# EAGLE board DummyLoad (EAGLE 8.6.3)
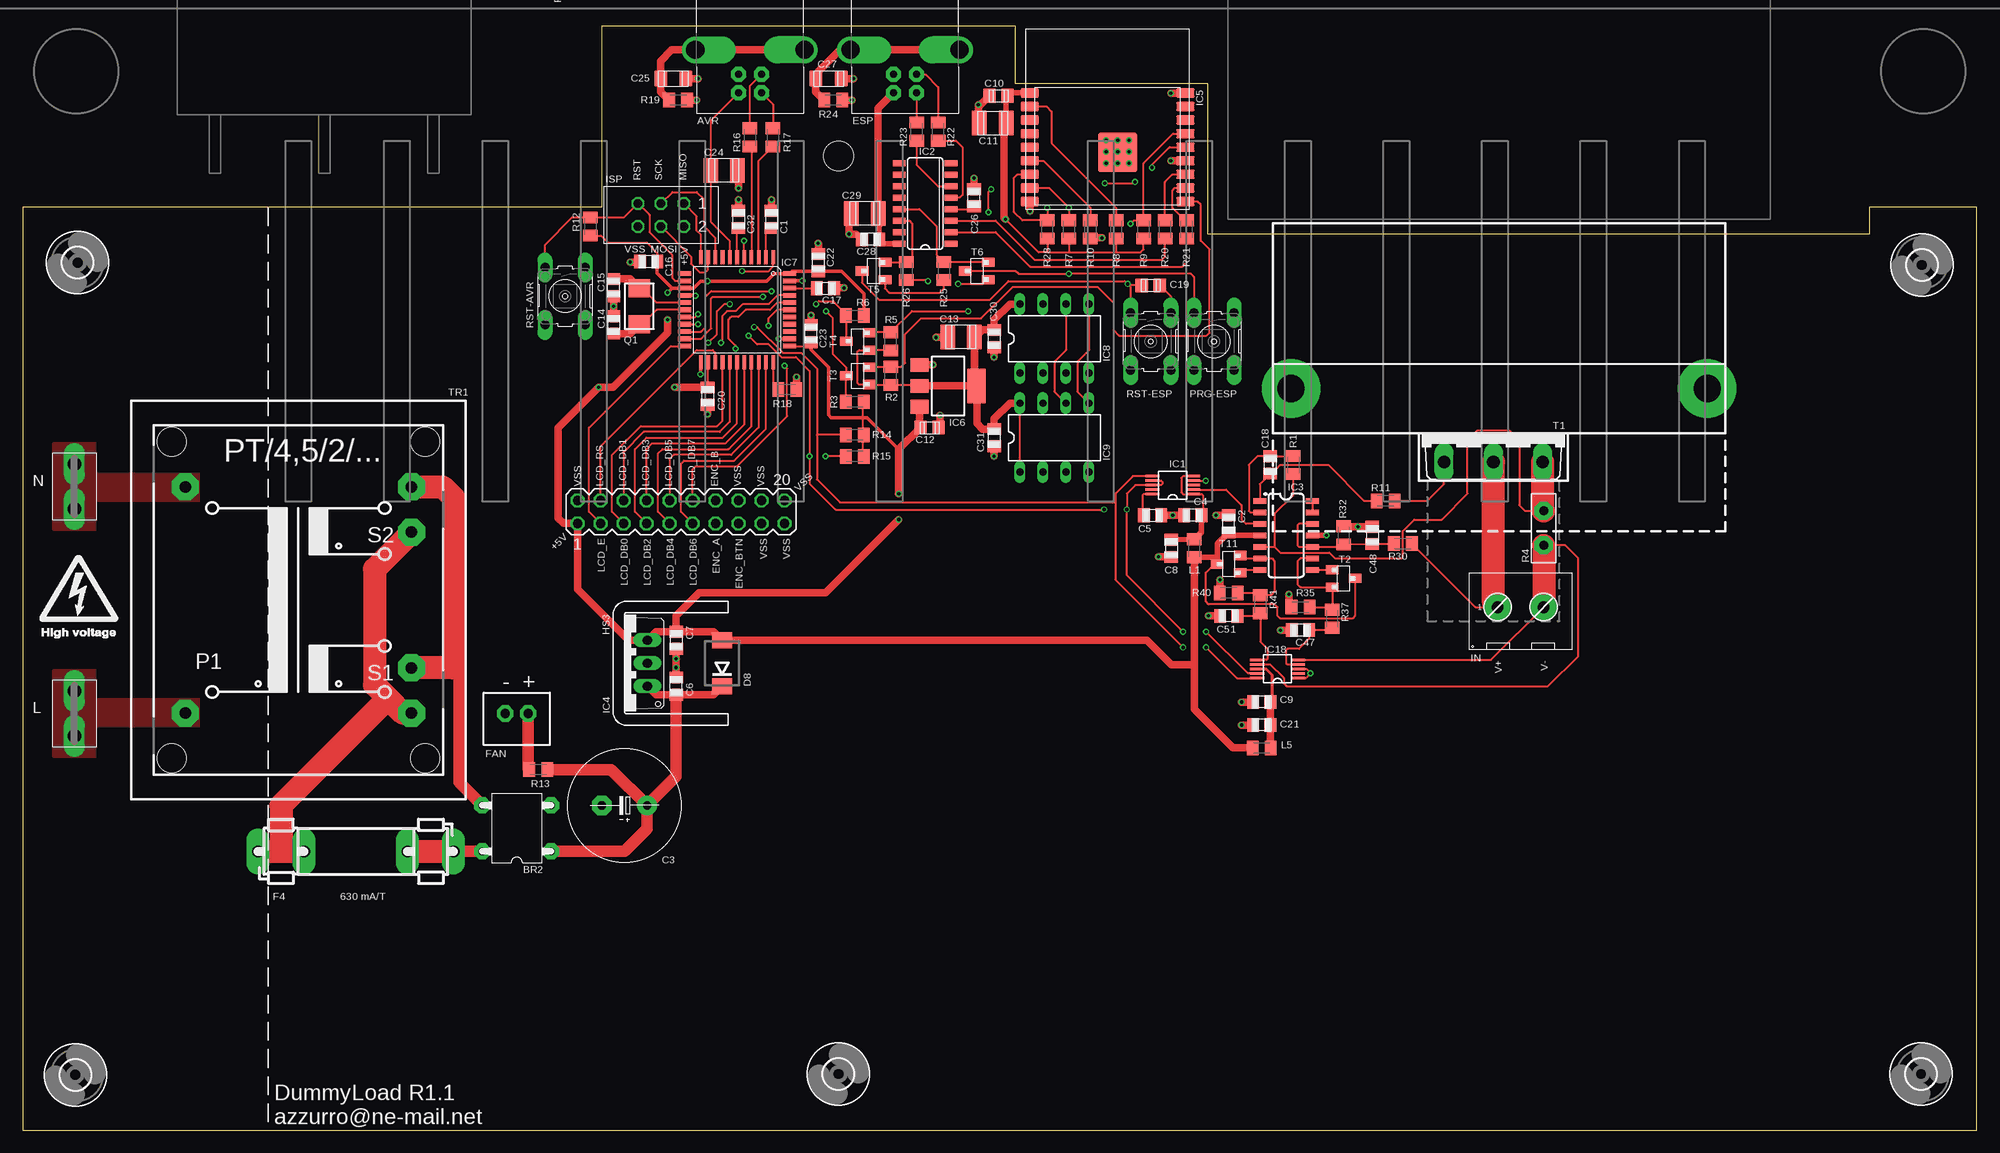
[diagram p0: board, top side]
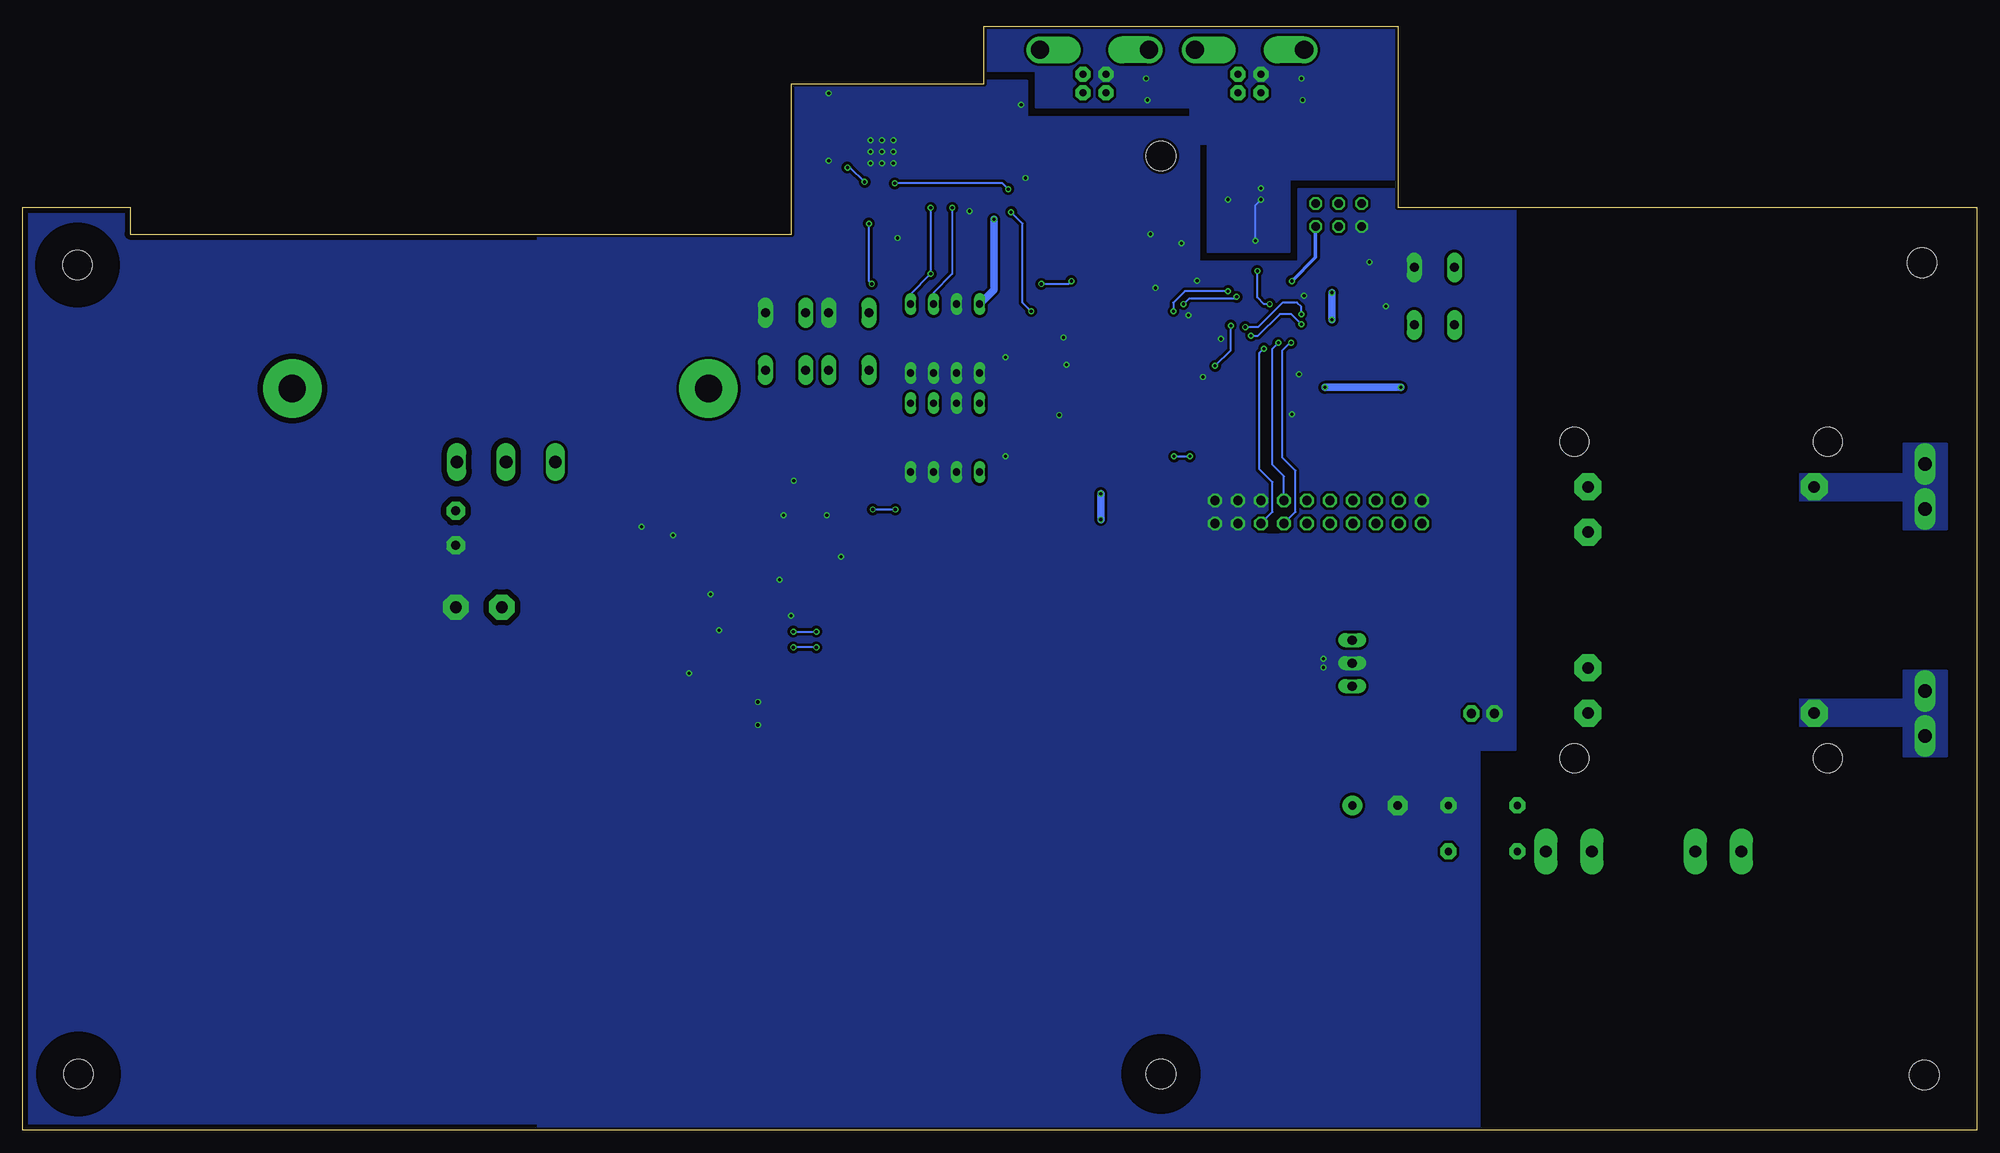
[diagram p1: board, bottom side, seen from below]

Size 216 x 122 mm. Coordinates in mm from the lower left corner, seen from the top.
Outline: 0,0 216,0 216,102 204.12,102 204.12,99 131,99 131,115.65 109.75,115.65 109.75,122 64,122 64,102 0,102 0,0
Copper layers (1*16): Top 0.035mm / dielectric 1.6mm / Bottom 0.035mm
Design rules "devnetX_JLCPCB_2-layer_PCB_eagle_rule": minimum track width 3.5mil, minimum drill 0.2mm, track to track 5mil, track to pad 5mil, pad to pad 5mil, via to via 5mil, smd to smd 0mil, copper to edge 8mil, drill to drill 10mil, minimum pad ring 3mil, minimum via ring 6mil, stop-mask expansion 0mil, vias tented up to drill 100mil, thermal gap 10mil
Holes 3.3 mm at 90.17,107.63
bRestrict: 4 lines

## Footprints (pad centres in the part's own frame; a part is rotated, then mirrored left to right if it is on the bottom)
USB-B = drill 0.8 pad 1.676 octagon: +5V 1.27,4.763; D+ -1.27,2.71; D- -1.27,4.763; GND 1.27,2.71 | drill 2 pad 2.54 offset: SH1 -6.032,0; SH2 6.032,0
BR-DIL2 = drill 0.8 pad 1.778 octagon: AC1 -2.54,3.81; AC2 2.54,3.81; DC+ -2.54,-3.81; DC- 2.54,-3.81
0805 = smd 1.3 x 1.5: 1 -0.953,0; 2 0.953,0
C+/5/12.5 = drill 0.9 pad 2.184: + -2.5,0 | drill 0.9 pad 2.184 octagon: - 2.5,0
C0805 = smd 1.5 x 1.35: 1 0,1; 2 0,-1
C1210 = smd 2.7 x 1.6: 1 0,1.475; 2 0,-1.475
C1206 = smd 1.8 x 1.45: 1 0,1.4; 2 0,-1.4
DO214AA-CGRB307-G = smd 1.8 x 2.2: A 2.55,0; C -2.55,0
F5X20 = drill 1.3 pad 2.54 long: 1 -11.43,0; 2 -6.35,0; 3 5.08,0; 4 10.16,0
JST-PH-2.0-2P = drill 1.016 pad 1.778 octagon: 1 -1.27,0; 2 1.27,0
3,3 = hole 3.3: 0,0
CR201-50 = drill 3 pad 6.452: 1 -23,-4.95; 2 23,-4.95
VSSOP10 = smd 0.3 x 1.55: 1 -1,-2.25; 2 -0.5,-2.25; 3 0,-2.25; 4 0.5,-2.25; 5 1,-2.25; 6 1,2.25; 7 0.5,2.25; 8 0,2.25; 9 -0.5,2.25; 10 -1,2.25
SOP16 = smd 0.635 x 1.422: 1 -4.445,-2.857; 2 -3.175,-2.857; 3 -1.905,-2.857; 4 -0.635,-2.857; 5 0.635,-2.857; 6 1.905,-2.857; 7 3.175,-2.857; 8 4.445,-2.857; 9 4.445,2.857; 10 3.175,2.857; 11 1.905,2.857; 12 0.635,2.857; 13 -0.635,2.857; 14 -1.905,2.857; 15 -3.175,2.857; 16 -4.445,2.857
SO14 = smd 0.6 x 1.4: 1 -3.81,-2.9; 2 -2.54,-2.9; 3 -1.27,-2.9; 4 0,-2.9; 5 1.27,-2.9; 6 2.54,-2.9; 7 3.81,-2.9; 8 3.81,2.9; 9 2.54,2.9; 10 1.27,2.9; 11 0,2.9; 12 -1.27,2.9; 13 -2.54,2.9; 14 -3.81,2.9
TO220V = drill 1.016 long: 1 -2.54,-2.54; 2 0,-2.54; 3 2.54,-2.54
ESP-WROOM02 = smd 2 x 1: 1 -8.6,1.9; 2 -8.6,0.4; 3 -8.6,-1.1; 4 -8.6,-2.6; 5 -8.6,-4.1; 6 -8.6,-5.6; 7 -8.6,-7.1; 8 -8.6,-8.6; 9 -8.6,-10.1; 10 8.6,-10.1; 11 8.6,-8.6; 12 8.6,-7.1; 13 8.6,-5.6; 14 8.6,-4.1; 15 8.6,-2.6; 16 8.6,-1.1; 17 8.6,0.4; 18 8.6,1.9 | smd 4.3 x 4.3: TP 1.12,-4.68
SOT223 = smd 1.5 x 2: 1 -2.3,-3.15; 2 0,-3.15; 3 2.3,-3.15 | smd 3.8 x 2: 4 0,3.15
TQFP44 = smd 1.5 x 0.5: 1 -5.8,4; 2 -5.8,3.2; 3 -5.8,2.4; 4 -5.8,1.6; 5 -5.8,0.8; 6 -5.8,0; 7 -5.8,-0.8; 8 -5.8,-1.6; 9 -5.8,-2.4; 10 -5.8,-3.2; 11 -5.8,-4; 23 5.8,-4; 24 5.8,-3.2; 25 5.8,-2.4; 26 5.8,-1.6; 27 5.8,-0.8; 28 5.8,0; 29 5.8,0.8; 30 5.8,1.6; 31 5.8,2.4; 32 5.8,3.2; 33 5.8,4 | smd 0.5 x 1.5: 12 -4,-5.8; 13 -3.2,-5.8; 14 -2.4,-5.8; 15 -1.6,-5.8; 16 -0.8,-5.8; 17 0,-5.8; 18 0.8,-5.8; 19 1.6,-5.8; 20 2.4,-5.8; 21 3.2,-5.8; 22 4,-5.8; 34 4,5.8; 35 3.2,5.8; 36 2.4,5.8; 37 1.6,5.8; 38 0.8,5.8; 39 0,5.8; 40 -0.8,5.8; 41 -1.6,5.8; 42 -2.4,5.8; 43 -3.2,5.8; 44 -4,5.8
DIL8 = drill 0.813 long: 1 -3.81,-3.81; 2 -1.27,-3.81; 3 1.27,-3.81; 4 3.81,-3.81; 5 3.81,3.81; 6 1.27,3.81; 7 -1.27,3.81; 8 -3.81,3.81
KL2-691311500002 = drill 1.3 pad 2.8 octagon: 1 -2.54,0; 2 2.54,0
ML6 = drill 0.914 octagon: 1 -2.54,-1.27; 2 -2.54,1.27; 3 0,-1.27; 4 0,1.27; 5 2.54,-1.27; 6 2.54,1.27
FASTON-4.8X0.8 = drill 1.5 pad 2.3 long: A1 -2.5,0; A2 2.5,0
C0805K@1 = smd 1.3 x 1.6: 1 -1,0; 2 1,0
MA10-2 = drill 1.016 octagon: 1 -11.43,-1.27; 2 -11.43,1.27; 3 -8.89,-1.27; 4 -8.89,1.27; 5 -6.35,-1.27; 6 -6.35,1.27; 7 -3.81,-1.27; 8 -3.81,1.27; 9 -1.27,-1.27; 10 -1.27,1.27; 11 1.27,-1.27; 12 1.27,1.27; 13 3.81,-1.27; 14 3.81,1.27; 15 6.35,-1.27; 16 6.35,1.27; 17 8.89,-1.27; 18 8.89,1.27; 19 11.43,-1.27; 20 11.43,1.27
B3F-10XX = drill 1 pad 1.676 long: 1 -3.175,1.905; 2 3.175,1.905; 3 -3.175,-2.54; 4 3.175,-2.54
Q-5X3.2MM-TXC-7A.SERIES = smd 2 x 2.4: 1 -2,0; 2 2,0
C0805K = smd 1.3 x 1.6: 1 -1,0; 2 1,0
R-SHUNT-VSR = drill 1 pad 2 octagon: 1 -1.905,0; 2 1.905,0
TOP3AV = drill 1.397 long: B -5.461,-3.175; C 0,-3.175; E 5.461,-3.175
SOT23-BEC = smd 1 x 1.4: B -0.953,-1.27; C 0,1.27; E 0.953,-1.27
SOT23 = smd 1 x 1.4: 1 -0.953,-1.27; 2 0.953,-1.27; 3 0,1.27
PT/4,5/2/.. = drill 1.27 pad 3 octagon: 1 -12.5,12.5; 2 -12.5,-12.5; 3 12.5,-12.5; 4 12.5,-7.5; 5 12.5,7.5; 6 12.5,12.5 | hole 3.2: -14,17.5; -14,-17.5; 14,-17.5; 14,17.5

## Placement (x,y rotation side)
AVR  [USB-B]  80.39,119.38 180 top
BR2  DF04M  [BR-DIL2]  54.61,33.34 90 top
C1  100n/16V  [0805]  82.77,100.65 270 top
C2  100n/16V  [0805]  133.31,66.99 90 top
C3  2200µ/25V  [C+/5/12.5]  66.52,35.88 180 top
C4  100n/16V  [0805]  129.34,67.94 180 top
C5  330n/16V  [0805]  124.89,67.94 0 top
C6  330n/50V  [0805]  72.23,49.05 90 top
C7  100n/50V  [0805]  72.23,54.13 270 top
C8  100n/16V  [0805]  126.96,64.29 270 top
C9  100n/16V  [0805]  136.96,47.31 180 top
C10  100n/16V  [C0805]  107.85,114.3 90 top
C11  10µ/16V  [C1210]  107.22,111.28 90 top
C12  100n/16V  [C0805]  100.23,77.63 90 top
C13  10µ/16V  [C1210]  103.73,87.63 270 top
C14  22pF/50V C0G  [0805]  65.31,88.98 270 top
C15  22pF/50V C0G  [0805]  65.31,93.11 90 top
C16  100n/16V  [0805]  69.2,95.96 180 top
C17  100n/16V  [0805]  88.72,93.03 0 top
C18  1n/50V  [0805]  137.91,73.5 90 top
C19  100n/16V  [C0805]  124.68,93.34 90 top
C20  100n/16V  [0805]  75.71,81.12 270 top
C21  100n/16V  [0805]  136.96,44.77 180 top
C22  100n/16V  [0805]  87.95,95.87 90 top
C23  100n/16V  [0805]  87.14,88.03 90 top
C24  10µ/16V  [C1210]  77.53,106.05 270 top
C25  4n/1kV  [C1206]  71.91,116.2 90 top
C26  100n/16V  [0805]  105.16,103.03 90 top
C27  4n/1kV  [C1206]  89.06,116.2 90 top
C28  100n/16V  [0805]  93.72,98.42 180 top
C29  10µ/16V  [C1210]  93.09,101.28 270 top
C30  100n/16V  [0805]  107.38,87.47 270 top
C31  100n/16V  [0805]  107.38,76.52 270 top
C32  1µ/35V  [0805]  79.12,100.65 270 top
C47  10n/16V  [0805]  141.24,55.24 180 top
C48  100n/16V  [0805]  149.18,65.72 270 top
C51  10n/16V  [0805]  133.31,56.83 180 top
D8  CGRB307-G  [DO214AA-CGRB307-G]  77.31,51.59 90 top
ESP  [USB-B]  97.53,119.38 180 top
F4  630 mA/T  [F5X20]  37.46,30.8 0 top
FAN  [JST-PH-2.0-2P]  54.61,46.04 0 top
H1  MOUNT-HOLE3.3  [3,3]  6.08,95.85 0 top
H2  MOUNT-HOLE3.3  [3,3]  5.83,6.1 0 top
H3  MOUNT-HOLE3.3  [3,3]  90.17,6.2 0 top
H4  MOUNT-HOLE3.3  [3,3]  209.82,6.2 0 top
H5  MOUNT-HOLE3.3  [3,3]  209.93,95.6 0 top
HS1  [CR201-50]  163.19,76.99 180 top
HS3  D01S  [D01S]  66.52,51.59 270 top
IC1  DAC70501ZDGS  [VSSOP10]  127.11,71.28 90 top
IC2  CH340C  [SOP16]  99.76,102.39 90 top
IC3  QUAD-OPVOPA4197  [SO14]  139.66,65.72 270 top
IC4  7805TV  [TO220V]  66.52,51.59 90 top
IC5  ESP-WROOM02  [ESP-WROOM02]  119.92,112.71 0 top
IC6  LD117AS33TR  [SOT223]  102.3,82.23 270 top
IC7  ATMEGA32U4-AU  [TQFP44]  78.96,90.65 270 top
IC8  24LC512P  [DIL8]  114.05,87.47 0 top
IC9  24LC512P  [DIL8]  114.05,76.52 0 top
IC18  ADS1115  [VSSOP10]  138.7,50.96 90 top
IN  [KL2-691311500002]  165.58,57.78 0 top
ISP  [ML6]  70.55,101.12 180 top
L  FASTON4.8X0.8  [FASTON-4.8X0.8]  5.71,46.04 90 top
L1  MPZ2012S601AT000  [C0805K@1]  129.5,64.29 270 top
L5  MPZ2012S601AT000  [C0805K@1]  136.96,42.23 180 top
N  FASTON4.8X0.8  [FASTON-4.8X0.8]  5.71,71.12 90 top
PANEL  [MA10-2]  72.77,68.31 0 top
PRG-ESP  [B3F-10XX]  131.98,87.15 270 top
Q1  16MHz  [Q-5X3.2MM-TXC-7A.SERIES]  68.17,91.04 270 top
R1  1k 0.5% 50 ppm 1/10W  [C0805K]  140.45,73.5 90 top
R2  10k 5% 1/10W  [C0805K]  95.95,83.34 90 top
R3  10k 5% 1/10W  [C0805K]  91.98,80.49 180 top
R4  1R 0.5% 4ppm 1W  [R-SHUNT-VSR]  168.12,66.52 270 top
R5  10k 5% 1/10W  [C0805K]  95.95,87.15 90 top
R6  10k 5% 1/10W  [C0805K]  91.98,90.01 180 top
R7  10k 1/10W 5%  [C0805K]  115.63,99.54 90 top
R8  10k 1/10W 5%  [C0805K]  120.87,99.54 90 top
R9  10k 1/10W 5%  [C0805K]  123.89,99.54 90 top
R10  10k 1/10W 5%  [C0805K]  118.01,99.54 90 top
R11  220R 1% 1/10W  [C0805K]  150.65,69.53 0 top
R12  10k 5% 1/10W  [C0805K]  62.77,99.85 90 top
R13  100R 1% 1/4W  [C0805K]  56.99,39.85 0 top
R14  10k 5% 1/10W  [C0805K]  91.98,76.83 180 top
R15  10k 5% 1/10W  [C0805K]  91.98,74.45 180 top
R16  22R 5% 1/10W  [C0805K]  80.39,109.7 90 top
R17  22R 5% 1/10W  [C0805K]  82.93,109.7 90 top
R18  10k 5% 1/10W  [C0805K]  84.52,81.84 0 top
R19  1M 5% 1/10W  [C0805K]  72.45,113.82 0 top
R20  470R 5% 1/10W  [C0805K]  126.27,99.54 90 top
R21  470R 5% 1/10W  [C0805K]  128.65,99.54 90 top
R22  22R 5% 1/10W  [C0805K]  101.19,110.33 90 top
R23  22R 5% 1/10W  [C0805K]  98.81,110.33 90 top
R24  1M 5% 1/10W  [C0805K]  89.6,113.82 0 top
R25  10k 5% 1/10W  [C0805K]  101.82,94.93 90 top
R26  10k 5% 1/10W  [C0805K]  97.69,94.93 90 top
R28  10k 5% 1/10W  [C0805K]  113.25,99.54 90 top
R30  100k 0.1% 25ppm 1/10W  [C0805K]  152.56,64.81 0 top
R32  3.9k 0.1% 25ppm 1/10W  [C0805K]  146.01,65.72 270 top
R35  4k7 1% 1/10W  [C0805K]  141.24,57.78 180 top
R37  2k2 1% 1/10W  [C0805K]  144.74,56.52 270 top
R40  4k7 1% 1/10W  [C0805K]  133.31,59.37 180 top
R41  2k2 1% 1/10W  [C0805K]  136.8,58.1 270 top
RST-AVR  [B3F-10XX]  60.27,92.15 270 top
RST-ESP  [B3F-10XX]  125,87.15 270 top
T1  IRFP3710  [TOP3AV]  162.56,76.99 0 top
T2  BC847ALT1G  [SOT23-BEC]  146.01,60.96 270 top
T3  PMV130ENEAR  [SOT23]  92.3,83.34 90 top
T4  PMV130ENEAR  [SOT23]  92.3,87.15 90 top
T5  BC847ALT1G  [SOT23-BEC]  94.04,94.93 90 top
T6  BC847ALT1G  [SOT23-BEC]  105.47,94.93 90 top
T11  BC847ALT1G  [SOT23-BEC]  133.31,62.55 90 top
TR1  PT 4.5/2/8  [PT/4,5/2/..]  30.48,58.58 0 top
U$1  [CASE-Z17]  108,26 0 top
U$2  [IEC-C14-FUSED-6200.2200]  33.34,129.18 0 top  (outside the outline)
U$3  [FAN60X25]  163.19,113.14 0 top
U$4  [SWITCH-ROCKER-1858.1103]  22.54,-77.36 180 top  (outside the outline)

## Library data of the parts
AVR ESP = goujine-connectors; OC_RS: 674-1328
BR2 = goujine; OC_MOUSER: 621-DF04M; OC_MOUSER_ALT: 512-DF04M
C1 C2 C4 C7-C9 C16 C17 C20-C23 C26 C28 C30 C31 C48 = goujine; OC_MOUSER: 810-C2012X7R2A104K
C3 = neumluc; OC_MOUSER: 667-EEU-FS1E222
C5 C6 = goujine; OC_MOUSER: 80-C0805C334K5RECTU
C10 C12 C19 = neumluc; OC_MOUSER: 810-C2012X7R2A104K
C11 C13 C24 C29 = neumluc; OC_MOUSER: 963-UMK316BBJ106KL-T
C14 C15 = goujine; OC_MOUSER: 603-CC805JRNPO9BN220
C18 = goujine; OC_MOUSER: 603-CC805KRX7R0BB102
C25 C27 = neumluc; OC_MOUSER: 581-1206AC392K
C32 = goujine; OC_MOUSER: 963-UMK212B7105KG-T
C47 C51 = goujine; OC_MOUSER: 80-C0805C103K1R
D8 = neumluc; OC_MOUSER: 750-CGRB307-G
F4 = goujine; OC_MOUSER: 693-0751.0110
FAN = neumluc; OC_DIGIKEY: 455-1704-ND; OC_MOUSER_ADD: 369-MF60251V21UA99
H1-H5 = holes
HS1 = neumluc; OC_MOUSER: 588-CR201-50VE; OC_MOUSER_ADD: 588-CLA-TO-21E
HS3 = heatsink; OC_MOUSER: 532-576802B00
IC1 = neumluc; OC_MOUSER: 595-DAC70501ZDGS
IC2 = neumluc; OC_MOUSER: C84681
IC3 = neumluc; OC_MOUSER: 595-OPA4197IDR
IC4 = linear; OC_MOUSER: 511-L7805CV
IC5 = neumluc; OC_MOUSER: 356-ESPWROOM02D(4MB)
IC6 = neumluc; OC_MOUSER: 511-LD1117AS33
IC7 = we-chip; OC_MOUSER: 556-ATMEGA32U4-AU
IC8 IC9 = microchip; MF: MICROCHIP; MPN: 24LC256-E/P; OC_FARNELL: 9757970; OC_MOUSER: 579-24LC512-E/P; OC_NEWARK: 92C7169
IC18 = neumluc; OC_MOUSER: 595-ADS1115IDGSR
IN = neumluc; OC_MOUSER: 710-691311500002; OC_MOUSER_ADD: 565-72912-2; OC_MOUSER_ADD2: 565-6883
ISP = neumluc; OC_FARNELL: unknown; OC_MOUSER: 649-67996-406HLF; OC_NEWARK: unknown
L N = neumluc; OC_CONRAD: 736079; OC_CONRAD_ADD: 1022092; OC_FARNELL: unknown; OC_NEWARK: unknown
L1 L5 = neumluc; OC_MOUSER: 810-MPZ2012S601AT000
PANEL = con-lstb; OC_FARNELL: unknown; OC_MOUSER: 649-67996-420HLF; OC_NEWARK: unknown
PRG-ESP RST-AVR RST-ESP = neumluc; OC_MOUSER: 653-B3F-1022
Q1 = neumluc; OC_MOUSER: 717-7A-16.000MAAJ-T
R1 = neumluc; OC_MOUSER: 754-RR1220P-102D
R2 R3 R5-R10 R12 R14 R15 R18 R25 R26 R28 = neumluc; OC_MOUSER: 652-CR0805-JW-103ELF
R4 = neumluc; OC_MOUSER: 71-VSRT1R0000DB
R11 R37 R41 = neumluc; OC_MOUSER: 652-CR0805FX-2201ELF
R13 = neumluc; OC_MOUSER: 660-RK73H2ATTD75R0F
R16 R17 R22 R23 = neumluc; OC_MOUSER: 652-CR0805JW-220ELF
R19 R24 = neumluc; OC_MOUSER: 652-CR0805JW-105ELF
R20 R21 = neumluc; OC_MOUSER: 652-CR0805FX-4700ELF
R30 = neumluc; OC_MOUSER: 754-RG2012P-104-B-T5
R32 = neumluc; OC_MOUSER: 754-RG2012P-392-BT5
R35 R40 = neumluc; OC_MOUSER: 652-CR0805FX-4701ELF
T1 = neumluc; OC_MOUSER: 942-IRFP3710PBF
T2 T5 T6 T11 = neumluc; OC_MOUSER: 863-BC847ALT1G
T3 T4 = neumluc; OC_MOUSER: 771-PMV130ENEAR
TR1 = neumluc; OC_RS: 201-8463; OC_RS_ADD: 546-5604
U$1-U$4 = neumluc

## Nets
+3.3V: C10.2 C11.2 C13.1 C30.1 C31.1 IC5.1 IC6.2 IC6.4 IC8.8 IC9.1 IC9.8 R2.1 R5.1 R7.1 R8.1 R9.1 R28.1 T3.1 T4.1
+5V: C2.1 C7.1 C12.1 C16.1 C20.1 C22.1 C23.1 D8.A IC3.4 IC4.3 IC6.3 IC7.14 IC7.24 IC7.34 IC7.44 ISP.2 L1.2 L5.2 PANEL.1 R3.1 R6.1 R12.1 R14.1 R15.1 T2.C T11.C
+9,5V: BR2.DC+ C3.+ C6.1 D8.C IC4.1 R13.2
ADC_CH0+: C51.1 IC18.6 R41.2
ADC_CH1+: C47.1 IC18.4 R37.2
ADC_VIN: C48.2 IC3.10 IC3.12 R30.1 R32.2
D+: IC7.4 R16.1
D-: IC7.3 R17.1
EEPROM-SCL: IC5.7 IC8.6 IC9.6 R28.2
EN: IC5.2 R8.2
ENC_A: IC7.1 PANEL.13
ENC_B: IC7.41 PANEL.14
ENC_BTN: IC7.40 PANEL.15
GPIO0-EEPROM-SDA: IC5.8 IC8.5 IC9.5 PRG-ESP.3 R7.2 T6.C
GPIO15: IC5.6 R10.2
ISET: IC1.2 IC3.3
L: L.A1 L.A2 TR1.2
LCD_DB0: IC7.26 PANEL.5
LCD_DB1: IC7.27 PANEL.6
LCD_DB2: IC7.28 PANEL.7
LCD_DB3: IC7.29 PANEL.8
LCD_DB4: IC7.30 PANEL.9
LCD_DB5: IC7.31 PANEL.10
LCD_DB6: IC7.32 PANEL.11
LCD_DB7: IC7.39 PANEL.12
LCD_E: IC7.22 PANEL.3
LCD_RS: IC7.25 PANEL.4
MISO: IC7.11 ISP.1
MOSI: IC7.10 ISP.4
N: N.A1 N.A2 TR1.1
N$1: C18.1 IC3.1 R11.1
N$2: IC3.7 T11.B
N$3: C17.1 IC7.42
N$4: C18.2 IC3.2 R1.2
N$5: IC3.5 R1.1 R4.1 T1.E
N$6: C9.1 C21.1 IC18.8 L5.1
N$7: C5.1 IC1.10
N$8: IC3.8 T2.B
N$9: IC3.13 IC3.14
N$10: AVR.D+ R16.2
N$11: AVR.D- R17.2
N$12: R11.2 T1.B
N$13: C32.2 IC7.6
N$14: C14.2 IC7.17 Q1.2
N$15: C15.2 IC7.16 Q1.1
N$16: IC7.33 R18.1
N$17: AVR.SH1 AVR.SH2 C25.1 R19.1
N$18: C26.1 IC2.4
N$19: IC2.3 R20.1
N$20: IC2.2 R21.1
N$21: ESP.D+ R22.2
N$22: ESP.D- R23.2
N$23: C27.1 ESP.SH1 ESP.SH2 R24.1
N$24: R25.1 T5.B
N$25: R26.1 T6.B
N$26: C1.2 IC7.2
N$27: BR2.AC1 F4.3 F4.4
N$28: IC2.14 R26.2 T5.E
N$29: IC2.13 R25.2 T6.E
N$30: HS1.1
N$31: HS1.2
N$33: F4.1 F4.2 TR1.3 TR1.5
N$34: BR2.AC2 TR1.4 TR1.6
N$35: FAN.2 R13.1
N$41: IC3.9 R35.1 R37.1 T2.E
N$45: IC3.6 R40.1 R41.1 T11.E
NRST: C19.1 IC5.15 R9.2 RST-ESP.3 T5.C
RESET: IC7.13 ISP.5 R12.2 RST-AVR.3
RX-AVR-3.3V: IC5.10 R2.2 T3.2
RX-AVR-5V: IC7.20 R3.2 T3.3
RX-ESP-HW: IC5.11 R21.2
SCK: IC7.9 ISP.3
SCL: IC1.6 IC7.18 IC18.10 R14.2
SDA: IC1.7 IC1.8 IC7.19 IC18.9 R15.2
TX-AVR-3.3V: IC5.14 R5.2 T4.2
TX-AVR-5V: IC7.21 R6.2 T4.3
TX-ESP-HW: IC5.12 R20.2
UD+: IC2.5 R22.1
UD-: IC2.6 R23.1
UGND: AVR.GND C1.1 C24.1 C25.2 C27.2 C32.1 ESP.GND IC7.5 R19.2 R24.2
VBUS: AVR.+5V C24.2 IC7.7
VDD: C4.1 C8.1 IC1.1 IC1.5 L1.1
VIN: IN.1 R30.2 T1.C
VSS: BR2.DC- C2.2 C3.- C4.2 C5.2 C6.2 C7.2 C8.2 C9.2 C10.1 C11.1 C12.2 C13.2 C14.1 C15.1 C16.2 C17.2 C19.2 C20.2 C21.2 C22.2 C23.2 C26.2 C28.2 C29.2 C30.2 C31.2 C47.2 C48.1 C51.2 FAN.1 IC1.4 IC3.11 IC4.2 IC5.9 IC5.13 IC5.18 IC5.TP IC6.1 IC7.15 IC7.23 IC7.35 IC7.43 IC8.1 IC8.2 IC8.3 IC8.4 IC8.7 IC9.2 IC9.3 IC9.4 IC9.7 IC18.1 IC18.3 IC18.5 IC18.7 IN.2 ISP.6 PANEL.2 PANEL.16 PANEL.17 PANEL.18 PANEL.19 PANEL.20 PRG-ESP.1 R4.2 R10.1 R18.2 R32.1 R35.2 R40.2 RST-AVR.1 RST-ESP.1
VUSB_ESP: C28.1 C29.1 ESP.+5V IC2.16

## Tracks (layer width: path | path; a pad name or v marks a point on that pad's centre or on a via)
+3.3V  (via drill 0.35)
  Top 0.203: 113.25,97 112.3,97 v108.65,100.65 | 113.25,97 115.63,97 | 115.63,97 120.87,97 | 120.87,97 123.57,97 123.89,97.31 R9.1 | R28.1 113.25,97 | R7.1 115.63,97 | R8.1 120.87,97 | IC9.1 IC9.8 | R5.1 93.61,86.15 T4.1 92.45,86.2 92.3,86.04 92.3,82.55 92.45,82.39 T3.1 95.9,82.39 R2.1 99.04,82.34 IC6.2 | 104.95,82.23 105.2,82.48 | C13.1 105.36,87.79 105.47,87.79
  Top 0.61: IC5.1 109.17,114.61 C10.2 108.69,114.14 C11.2
  Top 0.813: v108.65,100.65 108.49,100.81 108.49,111.08 C11.2 | IC8.8 109.12,91.28 107.38,89.53 C30.1 106.11,88.42 105.47,87.79 | IC9.8 109.12,80.33 107.38,78.58 C31.1 106.11,77.47 105.47,78.11 105.47,82.21 IC6.4 | C13.1 105.2,82.48 IC6.4 | IC6.2 IC6.4
  Bottom 0.813: IC8.8 108.65,92.87 v108.65,100.65
+5V  (via drill 0.35)
  Top 0.203: 133.58,65.72 C2.1 | T2.C 147.28,56.83 146.96,56.52 139.02,56.52 138.7,56.83 138.7,57.78 138.39,58.1 131.08,58.1 130.77,58.42 130.77,61.59 131.72,62.55 T11.C | 75.76,82.13 IC7.24 | C16.1 70.15,96.92 69.01,98.06 64.72,98.06 63.93,98.85 R12.1 | IC7.34 86.71,86.65 C23.1 | R3.1 92.87,80.38 92.87,78.74 92.87,76.94 | R14.1 92.87,76.94 | R15.1 92.87,74.56 92.87,76.94
  Top 0.406: 71.77,93.05 IC7.14 74.16,93.05 74.93,93.82 v75.72,93.82 82.23,93.82 83.06,94.65 IC7.44 85.03,94.92 C22.1 90.5,94.92 92.98,92.44 R6.1 | 71.77,93.05 v71.28,92.55 | 71.77,93.05 70.15,94.67 C16.1 | C23.1 87.14,86.22 89.06,84.3 89.06,79.06 89.38,78.74 92.87,78.74 93.33,78.74 96.84,75.23
  Top 0.61: IC3.4 133.58,65.72 | C2.1 132.04,64.77 132.04,63.34 | 132.04,63.34 T11.C | L1.2 131.99,63.29 132.04,63.34
  Top 0.813: L1.2 129.5,51.44 | 129.5,51.44 129.5,46.51 133.78,42.23 L5.2 | IC6.3 99.15,77.72 C12.1 96.84,75.23 v96.84,70.33 | 129.5,51.44 127,51.44 124.29,54.14 D8.A 76.37,55.09 C7.1 | C7.1 70.01,55.09 IC4.3 66.99,54.13 61.34,59.79 PANEL.1 59.8,67.04 59.21,67.63 59.21,77.63 v63.66,82.07 65.25,82.07 71.28,88.11 v71.28,89.53 | v72.07,82.07 C20.1 75.76,82.13 | C7.1 72.23,56.83 74.77,59.37 88.74,59.37 v96.84,67.47
  Bottom 0.406: ISP.2 73.09,96.46 v75.72,93.82
  Bottom 0.813: v63.66,82.07 v72.07,82.07 | v71.28,89.53 v71.28,92.55 | v96.84,67.47 v96.84,70.33
+9,5V
  Top 0.813: IC4.1 70.01,48.1 C6.1 76.37,48.1 D8.C
  Top 1.27: BR2.DC+ 66.52,30.8 69.02,33.3 C3.+ | C3.+ 72.23,39.09 C6.1 | R13.2 65.05,39.85 C3.+
ADC_CH0+
  Top 0.203: C51.1 136.53,56.83 R41.2 136.8,53.98 137.59,53.18 137.59,52.07 137.48,51.96 IC18.6
ADC_CH1+
  Top 0.203: IC18.4 139.79,51.46 139.66,51.59 139.66,53.02 139.81,53.18 141.09,53.18 142.2,54.29 C47.1 144.47,55.24 R37.2
ADC_VIN
  Top 0.203: IC3.12 141.09,66.99 140.93,66.83 140.93,64.61 141.09,64.45 IC3.10 145.74,64.45 R32.2 C48.2 151.51,64.77 R30.1
D+
  Top 0.203: R16.1 80.56,108.53 IC7.4
D-
  Top 0.203: IC7.3 81.36,107.13 R17.1
EEPROM-SCL  (via drill 0.35)
  Top 0.203: v113.25,101.92 R28.2 110.5,100.54 109.6,101.44 109.6,105.25 109.96,105.61 IC5.7 | IC8.6 115.31,86.2 114.05,84.93 114.05,81.6 IC9.6
  Bottom 0.203: v113.25,101.92 113.25,94.61 115.31,92.55 IC8.6
EN
  Top 0.203: IC5.2 113.17,113.11 113.73,112.55 113.73,109.06 120.87,101.92 R8.2
ENC_A  (via drill 0.35)
  Top 0.203: IC7.1 82.96,95.44 82.45,94.93 v79.53,94.93 | v78.17,91.28 77.53,91.28 76.74,90.49 76.74,87.95 v75.79,87
  Bottom 0.203: v78.17,91.28 78.8,91.28 79.53,92.01 v79.53,94.93 | PANEL.13 75.31,68.31 75.31,72.87 76.74,74.3 76.74,86.2 75.94,87 v75.79,87
ENC_B  (via drill 0.35)
  Top 0.203: IC7.41 83.42,92.25 82.45,91.28 79.6,91.28 78.8,90.49 77.85,90.49 77.37,90.01 77.37,87.15 v77.22,87
  Bottom 0.203: PANEL.14 76.58,72.23 77.85,73.5 77.85,86.36 v77.22,87
ENC_BTN  (via drill 0.35)
  Top 0.203: IC7.40 83.41,91.45 82.61,90.65 79.91,90.65 79.12,89.85 78.33,89.85 78.01,89.53 78.01,87.47 78.8,86.68 v78.8,86.36
  Bottom 0.203: PANEL.15 77.85,68.31 77.85,71.6 79.28,73.03 79.28,85.88 v78.8,86.36
GPIO0-EEPROM-SDA  (via drill 0.35)
  Top 0.203: T6.C 109.76,94.93 110.08,94.61 v115.63,94.61 129.13,94.61 129.44,94.3 PRG-ESP.3 | IC5.8 113.44,104.11 v115.63,101.92 R7.2 | IC8.5 117.86,86.2 116.58,84.93 116.58,81.6 IC9.5
  Bottom 0.203: v115.63,101.92 v115.63,94.61 117.86,92.39 IC8.5
GPIO15
  Top 0.203: IC5.6 112.82,107.11 118.01,101.92 R10.2
ISET
  Top 0.203: IC3.3 135.21,66.99 134.74,67.47 134.74,69.06 133.01,70.78 IC1.2
L
  pour Top (isolate 0.305, no thermals): 19.53,44.61 19.53,47.62 8.1,47.62 8.1,50.8 3.33,50.8 3.33,41.27 8.1,41.27 8.1,44.61
  pour Bottom (isolate 0.305, no thermals): 19.53,44.61 19.53,47.62 8.1,47.62 8.1,50.8 3.33,50.8 3.33,41.27 8.1,41.27 8.1,44.61
LCD_DB0
  Top 0.203: PANEL.5 65.15,68.31 65.15,74.61 68.33,77.79 76.74,77.79 77.36,78.41 IC7.26
LCD_DB1
  Top 0.203: IC7.27 78.16,78.26 77.06,77.15 68.64,77.15 66.42,74.93 PANEL.6
LCD_DB2
  Top 0.203: PANEL.7 67.69,68.31 67.69,75.25 68.96,76.52 77.37,76.52 78.96,78.11 IC7.28
LCD_DB3
  Top 0.203: IC7.29 79.76,77.95 77.69,75.88 69.59,75.88 68.96,75.25 PANEL.8
LCD_DB4
  Top 0.203: PANEL.9 70.23,68.31 70.23,74.77 70.71,75.25 78.01,75.25 80.56,77.8 IC7.30
LCD_DB5
  Top 0.203: IC7.31 81.36,77.65 78.33,74.61 71.98,74.61 71.5,74.14 PANEL.10
LCD_DB6
  Top 0.203: PANEL.11 72.77,68.31 72.77,73.66 73.09,73.98 78.64,73.98 82.16,77.5 IC7.32
LCD_DB7  (via drill 0.35)
  Top 0.203: IC7.39 83.41,90.65 82.45,89.69 v82.45,88.9 | PANEL.12 74.04,73.03 74.36,73.34 78.96,73.34 84.52,78.9 84.52,84.14 v84.2,84.45
  Bottom 0.203: v84.2,84.45 82.45,86.2 v82.45,88.9
LCD_E
  Top 0.203: PANEL.3 62.61,68.31 62.61,77.63 71.63,86.65 IC7.22
LCD_RS
  Top 0.203: PANEL.4 63.88,75.56 74.52,86.2 76.26,86.2 76.56,85.9 IC7.25
MISO
  Top 0.203: IC7.11 74.96,98.93 74.52,99.38 74.52,100.97 ISP.1
MOSI
  Top 0.203: ISP.4 73.88,96.52 73.88,95.73 74.83,94.77 75.47,94.77 75.76,95.07 IC7.10
N
  pour Top (isolate 0.305, no thermals): 19.53,69.53 19.53,72.55 8.1,72.55 8.1,75.88 3.33,75.88 3.33,66.36 8.1,66.36 8.1,69.53
  pour Bottom (isolate 0.305, no thermals): 19.53,69.53 19.53,72.55 8.1,72.55 8.1,75.88 3.33,75.88 3.33,66.36 8.1,66.36 8.1,69.53
N$1
  Top 0.203: 137.12,69.53 IC3.1 136.76,71.39 C18.1 138.07,72.55 139.02,73.5 144.3,73.5 148.27,69.53 R11.1
N$2
  Top 0.203: T11.B 134.89,61.91 IC3.7
N$3
  Top 0.203: IC7.42 87.79,93.05 C17.1
N$4
  Top 0.203: R1.2 140.4,74.45 C18.2 136.48,74.45 135.53,73.5 135.53,68.42 135.69,68.26 IC3.2
N$5
  Top 0.203: IC3.5 138.39,64.45 | 138.39,64.45 139.02,63.82 144.42,63.82 145.05,63.18 152.4,63.18 152.56,63.34 152.56,66.2 153.83,67.47 156.84,67.47 159.7,70.33 159.7,76.2 160.81,77.31 164.31,77.31 165.42,76.2 165.42,69.06 166.05,68.42 R4.1 | 138.39,64.45 138.39,68.1 140.45,70.17 R1.1
  Top 2.54: R4.1 168.02,68.52 T1.E
N$6
  Top 0.305: IC18.8 137.43,50.96 138.07,50.32 138.07,47.47 C9.1
  Top 0.813: C9.1 C21.1 137.91,42.27 L5.1
N$7
  Top 0.203: IC1.10 123.89,70.28 123.78,70.17 123.78,68.1 C5.1
N$8
  Top 0.203: IC3.8 T2.B
N$9
  Top 0.203: IC3.14 IC3.13
N$10
  Top 0.203: R16.2 80.39,115.4 AVR.D+
N$11
  Top 0.203: AVR.D- 82.93,113.35 R17.2
N$12
  Top 0.203: R11.2 155.26,69.53 157.1,71.37 T1.B
N$13
  Top 0.203: IC7.6 78.96,99.54 C32.2
N$14
  Top 0.203: IC7.17 70.07,90.65 68.47,89.04 Q1.2
  Top 0.813: C14.2 67.15,88.03 Q1.2
N$15
  Top 0.203: IC7.16 70.06,91.45 68.47,93.04 Q1.1
  Top 0.813: C15.2 67.15,94.06 Q1.1
N$16
  Top 0.203: IC7.33 82.96,82.39 R18.1
N$17
  Top 0.813: 73.72,119.38 AVR.SH2 | 71.5,113.87 R19.1 70.51,114.76 C25.1 70.51,118.14 71.75,119.38 AVR.SH2 | AVR.SH2 AVR.SH1
N$18
  Top 0.203: C26.1 104.84,101.76 IC2.4
N$19
  Top 0.203: IC2.3 107.54,100.49 111.82,96.2 125.95,96.2 126.27,96.52 R20.1
N$20
  Top 0.203: IC2.2 107.54,99.22 111.35,95.41 128.17,95.41 128.65,95.89 R21.1
N$21
  Top 0.203: ESP.D+ 99.77,116.67 101.19,115.25 R22.2
N$22
  Top 0.203: ESP.D- R23.2
N$23
  Top 0.813: 88.64,113.87 R24.1 87.66,114.76 C27.1 87.95,116.49 87.95,117 90.33,119.38 ESP.SH2 | 90.87,119.38 ESP.SH2 | ESP.SH2 ESP.SH1
N$24
  Top 0.203: T5.B 95.31,93.03 95.79,92.55 101.34,92.55 101.82,93.03 R25.1
N$25  (via drill 0.35)
  Top 0.203: v100.08,93.82 99.96,93.93 R26.1 | v103.41,93.5 106.11,93.5 106.58,93.98 T6.B
  Bottom 0.203: v103.41,93.5 100.39,93.5 v100.08,93.82
N$26
  Top 0.203: IC7.2 82.16,99.08 C1.2
N$27
  Top 1.27: F4.4 BR2.AC1
  Top 2.54: F4.3 F4.4
N$28
  Top 0.203: IC2.14 98.01,100.49 98.33,100.17 98.33,96.57 R26.2 97.65,95.89 T5.E
N$29
  Top 0.203: IC2.13 99.12,101.76 101.03,99.85 101.03,96.73 R25.2 106.69,95.93 T6.E
N$33
  Top 2.54: TR1.5 38.89,61.99 38.89,49.21 40.4,47.7 | TR1.3 42.03,46.08 40.4,47.7 | F4.1 28.57,30.8 | 28.57,30.8 F4.2 | 40.4,47.7 28.57,35.88 28.57,30.8
N$34
  Top 1.27: BR2.AC2 48.26,38.42 48.26,50.41 47.59,51.08
  Top 2.54: TR1.6 46.4,71.08 47.78,69.69 47.78,51.28 47.59,51.08 TR1.4
N$35
  Top 1.27: R13.1 55.88,39.96 FAN.2
N$41
  Top 0.203: IC3.9 141.24,63.18 140.93,62.87 140.93,60.33 141.24,60.01 T2.E 144.76,59.98 144.76,57.81 | 144.78,57.78 144.76,57.81 | 144.76,57.81 R37.1 | R35.1 144.74,57.78 144.76,57.81
N$45
  Top 0.203: T11.E 134.89,63.18 IC3.6 138.07,63.18 138.39,62.87 138.39,59.53 137.96,59.1 R41.1 136.53,59.37 R40.1
NRST  (via drill 0.35)
  Top 0.203: T5.C 92.77,93.66 94.68,91.76 106.9,91.76 108.97,93.82 121.82,93.82 v122.14,93.5 | IC5.15 127.16,110.11 123.89,106.84 R9.2 122.82,100.54 v122.46,100.17 | v122.14,93.5 122.46,93.19 RST-ESP.3 | C19.1 122.3,93.34 v122.14,93.5
  Bottom 0.203: v122.14,93.5 122.46,93.82 v122.46,100.17
RESET
  Top 0.203: IC7.13 72.11,93.85 71.82,94.14 71.82,96.68 69.28,99.22 69.28,101.12 ISP.5 66.47,100.85 R12.2 60.75,100.85 57.73,97.83 RST-AVR.3
RX-AVR-3.3V
  Top 0.203: T3.2 93.61,84.34 R2.2 97.11,84.34 97.53,84.77 97.53,87.95 99.28,89.69 105.95,89.69 109.44,93.19 118.81,93.19 120.55,91.44 120.55,88.42 121.19,87.79 130.87,87.79 131.19,88.11 131.19,97.31 130.24,98.27 130.24,102.23 129.86,102.61 IC5.10
RX-AVR-5V  (via drill 0.35)
  Top 0.203: R3.2 91.03,80.53 T3.3 | IC7.20 74.97,88.25 75.47,88.74 75.47,92.08 76.1,92.71 v82.77,92.71 | 90.71,83.34 T3.3 | v88.8,90.49 89.53,89.76 89.53,85.79 91.03,84.3 T3.3
  Bottom 0.203: v82.77,92.71 87.53,92.71 88.8,91.44 v88.8,90.49
RX-ESP-HW
  Top 0.203: R21.2 128.44,100.54 127.06,101.92 127.06,103.82 127.35,104.11 IC5.11
SCK
  Top 0.203: ISP.3 71.82,103.66 74.52,103.66 75.31,102.87 75.31,99.85 76.56,98.6 IC7.9
SCL  (via drill 0.35)
  Top 0.203: IC1.6 122.72,72.28 120.77,70.33 120.77,69.37 | IC7.18 74.35,89.85 v74.67,90.17 | v80.87,88.74 81.18,88.74 84.04,85.88 86.04,85.88 87.79,84.14 87.79,76.83 | 120.77,69.37 120.77,60.84 v128.27,53.34 | v130.81,53.34 134.19,49.96 IC18.10 | 87.79,76.83 87.79,71.91 90.33,69.37 120.77,69.37 | R14.2 87.79,76.83
  Bottom 0.203: v74.67,90.17 74.67,90.96 75.15,91.44 76.74,91.44 79.44,88.74 v80.87,88.74 | v128.27,53.34 v130.81,53.34
SDA  (via drill 0.35)
  Top 0.203: IC1.7 125.82,71.78 126,71.6 126,71.44 125.84,71.28 IC1.8 122.99,71.28 122.03,70.33 v122.03,68.58 122.03,61.32 v128.27,55.09 | 136.53,50.48 IC18.9 135.44,50.46 v130.81,55.09 | IC7.19 73.17,89.06 v74.67,89.06 | v80.23,87.79 81.18,86.84 82.45,86.84 83.88,85.41 85.47,85.41 87,83.88 v87,74.45 87,71.44 89.85,68.58 v119.54,68.58 | R15.2 v88.74,74.45
  Bottom 0.203: v74.67,89.06 75.79,90.17 77.06,90.17 79.44,87.79 v80.23,87.79 | v119.54,68.58 v122.03,68.58 | v130.81,55.09 v128.27,55.09 | v88.74,74.45 v87,74.45
TX-AVR-3.3V  (via drill 0.35)
  Top 0.203: T4.2 93.61,88.15 R5.2 98.28,90.49 v104.52,90.49 | v106.74,101.44 106.74,103.66 v107.06,103.98 | v119.6,104.62 122.78,104.62 v122.94,104.78 | v124.84,106.36 124.84,106.68 126.77,108.61 IC5.14
  Bottom 0.203: v104.52,90.49 105.47,91.44 105.47,100.17 v106.74,101.44 | v107.06,103.98 107.69,104.62 v119.6,104.62 | v122.94,104.78 124.52,106.36 v124.84,106.36
TX-AVR-5V  (via drill 0.35)
  Top 0.203: 90.87,87.15 T4.3 91.03,89.96 R6.2 90.98,90.22 89.6,91.6 88.01,91.6 v87.69,91.28 | IC7.21 74.97,87.45 76.1,88.58 76.1,91.92 76.26,92.08 v81.82,92.08
  Bottom 0.203: v87.69,91.28 87.06,91.92 81.98,91.92 v81.82,92.08
TX-ESP-HW
  Top 0.203: R20.2 126.27,104.78 127.11,105.61 IC5.12
UD+
  Top 0.203: R22.1 103.14,109.33 103.89,108.58 103.89,103.35 103.57,103.03 IC2.5
UD-
  Top 0.203: R23.1 98.81,106.68 101.19,104.3 IC2.6
UGND  (via drill 0.35)
  Top 0.203: IC7.5 v79.76,98.26 v79.75,98.27
  Top 0.813: v79.12,102.83 C32.1 | v82.77,102.83 C1.1 | C1.1 | v91.66,113.82 R24.2 | v74.52,113.82 R19.2 | 79.12,105.3 C24.1 79.12,105.93 v79.12,104.1 | C27.2 v91.82,116.2 | C25.2 v74.67,116.2
  Bottom 0.203: v79.75,98.27 79.75,102.19 v79.12,102.83
  pour Bottom (isolate 0.305, no thermals): 64,122 64,105 76,105 76,97 85,97 85,113 104,113 104,117 110,117 110,122
VBUS
  Top 0.203: AVR.+5V 76.06,111.56 C24.2 76.06,100.38 78.16,98.27 IC7.7
VDD
  Top 0.203: IC1.5 128.27,72.28 128.07,72.07 128.07,70.48 128.27,70.28 IC1.1 130.34,70.28 130.45,70.17 130.45,68.1 C4.1
  Top 0.61: C4.1 130.29,66.09 L1.1 C8.1
VIN
  Top 0.203: R30.2 160.59,57.78 IN.1
  Top 2.54: IN.1 162.56,58.26 T1.C
VSS  (via drill 0.35)
  Top 0.203: IC18.7 137.89,51.46 139.38,49.96 139.38,49.37 139.7,49.05 168.59,49.05 171.93,52.39 171.93,63.18 170.5,64.61 R4.2 | IC18.3 141.88,50.96 v142.35,50.48 141.83,49.96 IC18.1 | IC1.4 130.74,71.78 v130.77,71.75 | IC5.TP v121.04,108.1 v121.03,108.11 | R10.1 118.44,98.54 | C19.2 126.9,92.12 RST-ESP.1 | IN.2 162.29,51.96 IC18.5
  Top 0.406: IC7.43 86.17,93.85 v86.18,93.86 | IC7.15 74.3,92.25 v74.36,92.19 | IC7.35 83.58,87.45 v83.56,87.43 | v74.91,83.54 74.91,84.8 IC7.23
  Top 0.61: v144.1,65.72 IC3.11
  Top 0.813: C48.1 v147.59,66.67 146.05,66.67 R32.1 | v139.97,59.21 139.97,58.05 R35.2 | v139.02,55.24 C47.2 | v131.88,67.94 C2.2 | v132.35,60.8 132.35,59.42 R40.2 | v131.08,56.83 C51.2 | C4.2 v127.11,67.94 C5.2 | v125.53,63.34 C8.2 | v134.74,47.31 C9.2 | v134.74,44.77 C21.2 | C29.2 91.34,101.01 v91.34,99.02 92.13,99.02 C28.2 | C11.1 105.63,111.4 v105.63,113.3 105.86,113.3 C10.1 | 111.37,102.67 IC5.9 111.35,102.58 v111.35,101.56 | IC5.18 128.48,114.57 v126.9,114.57 | IC5.13 v126.9,107.11 | v105.16,105.21 C26.2 | v119.28,98.58 118.06,98.58 R10.1 | v107.38,85.41 C30.2 | v107.38,74.45 C31.2 | C15.1 v65.31,91.04 C14.1 | C15.1 | v90.79,93.06 89.71,93.06 C17.2 | v75.71,79.09 C20.2 | C12.2 101.42,77.82 v101.42,79.01 | IC6.1 99.19,84.57 v100.63,84.57 | v100.95,87.59 102.21,87.59 C13.2 | v67.13,95.92 68.2,95.92 C16.2 | C23.2 v87.14,90.05 | R18.2 85.52,83.19 v85.55,83.22 | C7.2 v72.23,52.07 v72.23,51.12 C6.2 | C22.2 87.95,97.97 v87.93,97.98
  Top 2.54: R4.2 IN.2
  other vias: 122.3,106.84 119.76,106.84 119.76,109.38 122.3,109.38 122.3,108.11 119.76,108.11 121.03,106.84 121.03,109.38
  pour Bottom (isolate 0.305, no thermals): 55,33 55,0 159,0 159,99 131,99 131,116 110,116 105,116 105,113 105,112 86,112 86,96 75,96 75,104 64,104 64,102 55,102 51,102 51,42 55,42
  pour Bottom (isolate 0.61, no thermals): 159,99 159,0 216,0 216,102 204,102 204,99
  pour Bottom (isolate 0.305, no thermals): 87,109 84,109 84,114 87,114
VUSB_ESP
  Top 0.61: IC2.16 95.2,97.95 C28.1 94.72,101.12
  Top 0.813: ESP.+5V 94.56,112.92 C29.1 94.72,101.12

## Text on the board
tNames: RST | SCK | MISO | VSS | MOSI | +5V | VSS | LCD_RS | LCD_DB1 | LCD_DB3 | LCD_DB5 | LCD_DB7 | ENC_B | VSS | VSS | VSS | +5V | LCD_E | LCD_DB0 | LCD_DB2 | LCD_DB4 | LCD_DB6 | ENC_A | ENC_BTN | VSS | VSS | V+ | V- | - | + | 630 mA/T | DummyLoad R1.1 / azzurro@ne-mail.net